# Altium PCB CRG.PcbDoc
Units mil, origin at the board's own origin, x right, y up, seen from the top; angles counter-clockwise.
Board outline 915 x 850 mil, 2 copper layers (Top Layer, Bottom Layer); 12 components, 12 nets, 35 pads, 5 vias.
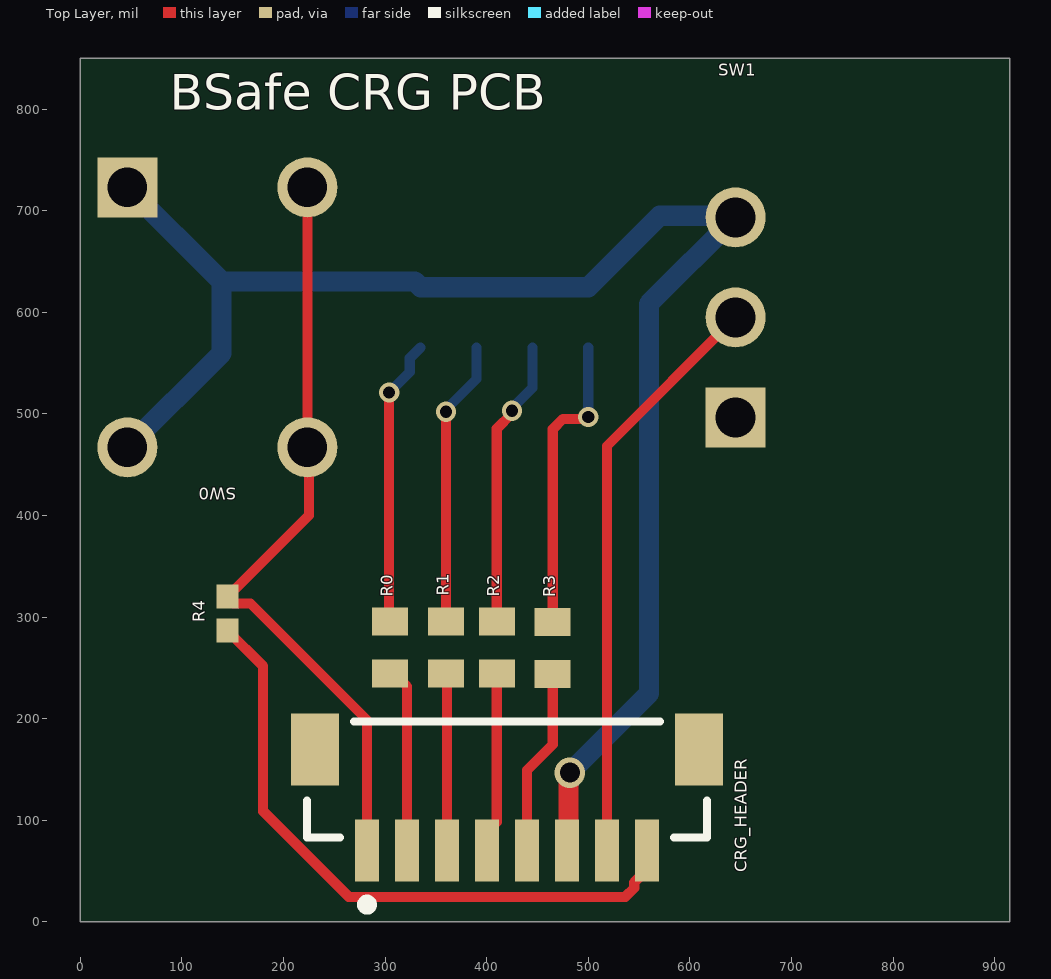
[diagram p0: Top Layer view]
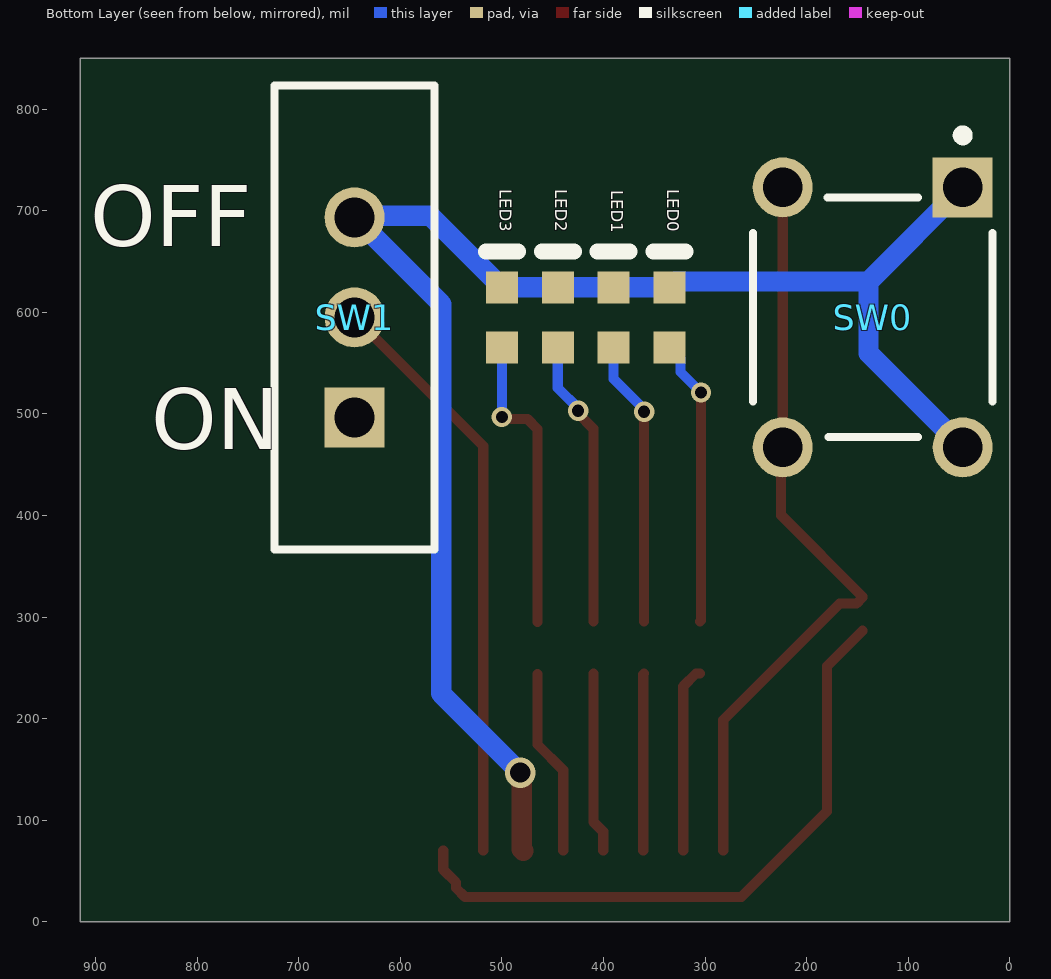
[diagram p1: Bottom Layer view, seen from below]

## Layer stack, top to bottom
Top Solder: solder mask 0.4, Solder Resist, Dk 3.5
Top Layer: signal copper 1.4
Dielectric 1: dielectric 12.6, FR-4, Dk 4.8
Bottom Layer: signal copper 1.4
Bottom Solder: solder mask 0.4, Solder Resist, Dk 3.5

## Board outline
0,0 0,850 915,850 915,0

## Design rules (kind name [scope] priority, off if disabled: settings)
Clearance [All] p1: gap=10 ignorepadtopadclearanceinfootprint=TRUE except(0: Arc-Hole Track-Hole SMDPad-Hole THPad-Hole Via-Hole Fill-Hole Poly-Hole Region-Hole Text-Hole)
PolygonConnect [All] p1: connectstyle=Relief reliefconductorwidth=10 reliefentries=4 polygonreliefangle="90 Angle" airgapwidth=10
RoutingVias [All] p1: holewidth=12 width=20 viastyle="Through Hole" minholewidth=12 minwidth=20 maxholewidth=20 maxwidth=30
SolderMaskExpansion [All] p1: expansion=4 istentingtop=FALSE
Width [All] p1: maxlimit=20 minlimit=10 preferedwidth=10
30 further rules are at their usual default settings.

## Components (designator, comment, footprint, x,y, rotation, side; value= is the part's Value field where it differs from the comment)
CRG_HEADER "BM08B-SRSS-TBT(LF)(SN)" FP-BM08B-SRSS-TBT_LF_SN-MFG 420,140 r180 top
LED0 "LTST-C190GKT" LTST-C190GKT_V 335,595 r90 bottom
LED1 "LTST-C190GKT" LTST-C190GKT_V 390,595 r90 bottom
LED2 "LTST-C190GKT" LTST-C190GKT_V 445,595 r90 bottom
LED3 "LTST-C190GKT" LTST-C190GKT_V 500,595 r90 bottom
R0 "RK73B1JTTD221J" RESC1608X55X30LL20T10 305,270 r90 top value=220
R1 "RK73B1JTTD221J" RESC1608X55X30LL20T10 360,270 r90 top value=220
R2 "RK73B1JTTD221J" RESC1608X55X30LL20T10 410,270 r90 top value=220
R3 "RK73B1JTTD221J" RESC1608X55X30LL20T10 465,269.41 r90 top value=220
R4 "RC0402FR-0747KL" RESC1005X40X25NL05T10 145,303.27 r90 top value=47k
SW0 "1825910-6" TECO-1825910-6_V 135,595 r270 bottom
SW1 "EG1218" ESWI-EG1218_V 645,595 r90 bottom

## Footprints (in the part's own frame and the unit in brackets; to place one, negate y for a bottom-side part, rotate by r counter-clockwise, add the part's x,y. Pads: shape width x height; smd on the part's side, far side on the other; paste and mask are expansions set on the pad)
ESWI-EG1218_V [mm] "THD, 3-Leads, Body 11.6x4mm, Pitch 2.5mm"
  rect 1.5x1.5 hole 1: 1(-2.5,0)
  round 1.5 hole 1: 2(0,0) 3(2.5,0)
  silkscreen extent -5.8,-2 5.8,2, body extent -5.8,-2 5.8,2, height 7.4
FP-BM08B-SRSS-TBT_LF_SN-MFG [mm]
  rect 0.6x1.55 smd paste+0 mask+0: 1(3.5,1.775) 2(2.5,1.775) 3(1.5,1.775) 4(0.5,1.775) 5(-0.5,1.775) 6(-1.5,1.775) 7(-2.5,1.775) 8(-3.5,1.775)
  rect 1.2x1.8 smd paste+0 mask+0: 9(-4.8,-0.75) 10(4.8,-0.75)
  silkscreen extent -5,-1.45 5,3.25, body extent -5.5,-1.75 5.5,2.65, height 0.25
LTST-C190GKT_V [mm] "SMD, 2-Leads, Body 1.6x0.8mm"
  rect 0.8x0.8 smd: 1(-0.75,0) 2(0.75,0)
  silkscreen extent 1.65,-0.4 1.65,0.4, body extent -0.8,-0.4 0.8,0.4, height 0.9
RESC1005X40X25NL05T10 [mm] "Chip Resistor, 2-Leads, Body 1.00x0.50mm, IPC Medium Density"
  rect 0.6x0.55 smd: 1(-0.425,0) 2(0.425,0)
  body extent -0.53,-0.27 0.53,0.28, height 0.4
RESC1608X55X30LL20T10 [mm] "Chip Resistor, 2-Leads, Body 1.60x0.80mm, IPC High Density"
  rect 0.7x0.9 smd: 1(-0.65,0) 2(0.65,0)
  body extent -0.9,-0.5 0.9,0.5, height 0.55
TECO-1825910-6_V [mm] "Switch, 4-Leads, Body 5.99x5.99mm"
  rect 1.5x1.5 hole 0.99: 1(-3.25,2.25)
  round 1.5 hole 0.99: 2(3.25,2.25) 3(-3.25,-2.25) 4(3.25,-2.25)
  silkscreen extent -4.67,-2.99 2.99,3, body extent -3,-2.99 2.99,3, height 5

## Part data
CRG_HEADER: library part CMP-002-00076-1, "Conn Shrouded Header HDR 8 POS 1mm Solder ST SMD T/R / CONN HEADER SH 8POS TOP 1MM TIN"
LED0 LED1 LED2 LED3: library part CMP-007-00022-2, "LED Uni-Color Green, 100 mW, 30 mA, -55 to 85 degC, 2-Pin SMD, RoHS, Tape and Reel", Case/Package=0603, Colour=Green, Forward Current=20mA, Forward Voltage=2.1V, Manufacturer=Lite-On, Max Operating Temperature=85°C, Min Operating Temperature=-55°C, Package Description="2-Pin Surface Mount Device, Body 1.6 x 0.8 mm", Package Quantity=3000, Package Reference=C190GKT, Power=100mW, Datasheet URL=http://datasheet.octopart.com/LTST-C190GKT-Lite-On-datasheet-158530.pdf, Datasheet Version=Dec-06, Illumination Colour=Green, Lens Style=Clear, Luminous Intensity=6mcd, Manufacturer URL=http://www.us.liteon.com/, Mounting Technology=SM, Nominal Vf=2.1V, Packaging=TapeandReel, Pins=2, RoHS Compliant=True, Viewing Angle=130degrees
R0 R1 R2 R3: library part CMP-009-00180-2, "Fixed Resistor, Metal Glaze/thick Film, 0.125W, 220ohm, 75V, 5% +/-Tol, 200ppm/Cel, Surface Mount, 0603", Max Operating Temperature=155°C, Min Operating Temperature=-55°C, Tolerance=5%, RoHS Compliant=Yes
R4: library part CMP-009-00178-2, "Fixed Resistor, Metal Glaze/thick Film, 0.0625W, 47000ohm, 50V, 1% +/-Tol, 100ppm/Cel, Surface Mount, 0402", Max Operating Temperature=155°C, Min Operating Temperature=-55°C, Tolerance=1%, RoHS Compliant=Yes
SW0: library part CMP-011-00015-1, "Keypad Switch, 1 Switches, SPST, Momentary-tactile, 0.05A, 24VDC, 2.06N, 4 PCB Hole Cnt, Solder Terminal, Through Hole-straight", Max Operating Temperature=85°C, Min Operating Temperature=-35°C, RoHS Compliant=Yes
SW1: library part CMP-011-00006-3, "Slide Switch, SPDT, 500 V, -20 to 70 degC, 3-Pin THD, RoHS, Bulk", Contact Current Rating=200mA, Manufacturer=E-Switch, Max Operating Temperature=70°C, Min Operating Temperature=-20°C, Operating Force=250gf, Package Description="3-Pin Through Hole Device, Body 11.6 x 4 mm, Pitch 2.5 mm", Package Quantity=1000, Voltage Rating (AC)=30V, Case/Package=EG1218, Contact Finish=Silver, Contact Material=Copper, Contact Plating=Silver, Current Rating=200mA, Datasheet URL=https://www.e-switch.com/system/asset/product_line/data_sheet/119/EG.pdf, Datasheet Version=Oct-15, Manufacturer URL=http://www.e-switch.ch/en/, Mounting Technology=TH, Package Reference=EG1218, Packaging=Bulk, Pins=3, RoHS Compliant=True, Throw Configuration=SPDT, Voltage Rating (DC)=30V

## Via types
v1: diameter 20, hole 12, Top Layer to Bottom Layer, 4 vias
v2: diameter 30, hole 20, Top Layer to Bottom Layer, 1 vias

## Nets (pads, with @x,y where several pads share a name; then routed paths per layer and width w, separated by ;. In a path a pad name is that pad's centre, name@x,y a point inside that pad or via, vN(x,y) a via of type N, cw(c..) or ccw(c..) an arc to the next point about the centre after c; other vN are vias at no path point)
5V: CRG_HEADER.8 R4.1 | length 637.9
  Top Layer w10: R4.1 180,251.54 180,108.79 264.18,24.61 536.45,24.61 545.24,33.39 545.24,38.86 557.8,51.42 CRG_HEADER.8
CRG0: CRG_HEADER.2 R0.1 | length 183.5
  Top Layer w10: R0.1 308.94,244.41 321.57,231.77 CRG_HEADER.2
CRG1: CRG_HEADER.3 R1.1 | length 174.7
  Top Layer w10: R1.1 360.94,243.46 CRG_HEADER.3
CRG2: CRG_HEADER.4 R2.1 | length 178.3
  Top Layer w10: CRG_HEADER.4 400.32,88.82 410,98.5 R2.1
CRG3: CRG_HEADER.5 R3.1 | length 184.2
  Top Layer w10: CRG_HEADER.5 439.68,149.27 465,174.59 R3.1
CRG_BUTT: CRG_HEADER.1 R4.2 SW0.3 SW0.4 | length 752.6
  Top Layer w10: SW0.4 SW0.3 ; SW0.4@225.2,467.05 225.2,400.2 R4.2 145,319.17 150.83,313.35 167.47,313.35 282.2,198.61 CRG_HEADER.1
CRG_SWITCH: CRG_HEADER.7 SW1.2 | length 577.3
  Top Layer w10: CRG_HEADER.7 518.43,468.43 SW1.2
GND: CRG_HEADER.6 LED0.2 LED1.2 LED2.2 LED3.2 SW0.1 SW0.2 SW1.3 | length 1562.2
  Top Layer w20: CRG_HEADER.6 480.53,71.59 480.53,145.53 v2(482,147)
  Bottom Layer w20: SW0.2 139.09,559.72 139.09,630.28 ; SW0.1 139.09,630.28 ; v2(482,147) 559.72,224.72 559.72,608.15 SW1.3 ; SW1.3@645,695 570.47,695 LED3.2 LED2.2 LED1.2 LED0.2 329.25,630.28 139.09,630.28
NetLED0_1: LED0.1 R0.2 | length 283.1
  Top Layer w10: v1(304,521) 304,296.59 R0.2
  Bottom Layer w10: v1(304,521) 324.25,541.25 324.25,554.72 LED0.1
NetLED1_1: LED1.1 R1.2 | length 282.3
  Top Layer w10: R1.2 v1(360,502)
  Bottom Layer w10: v1(360,502) 360,504.36 390,534.36 LED1.1
NetLED2_1: LED2.1 R2.2 | length 284.4
  Top Layer w10: R2.2 410,485.29 425,500.29 v1(425,503)
  Bottom Layer w10: v1(425,503) 425,505.43 445,525.43 LED2.1
NetLED3_1: LED3.1 R3.2 | length 298.4
  Top Layer w10: R3.2 465,485 475.09,495.09 498.09,495.09 v1(500,497)
  Bottom Layer w10: v1(500,497) LED3.1
pads on no net: CRG_HEADER.9 CRG_HEADER.10 SW1.1

## Silkscreen, mask and mechanical layers (free items; w line width, h text height)
Top Overlay:
  text "BSafe CRG PCB" at 88,787.64 h60
Bottom Overlay:
  text "OFF" at 905,665 h60
  text "ON" at 845,465 h60